# Altium PCB battery_module.PcbDoc
Units mm, origin at the board's own origin, x right, y up, seen from the top; angles counter-clockwise.
Board outline 90 x 40 mm, 2 copper layers (Top Layer, Bottom Layer), stack 2.021 mm thick; 12 components, 3 nets, 17 pads, 0 vias.
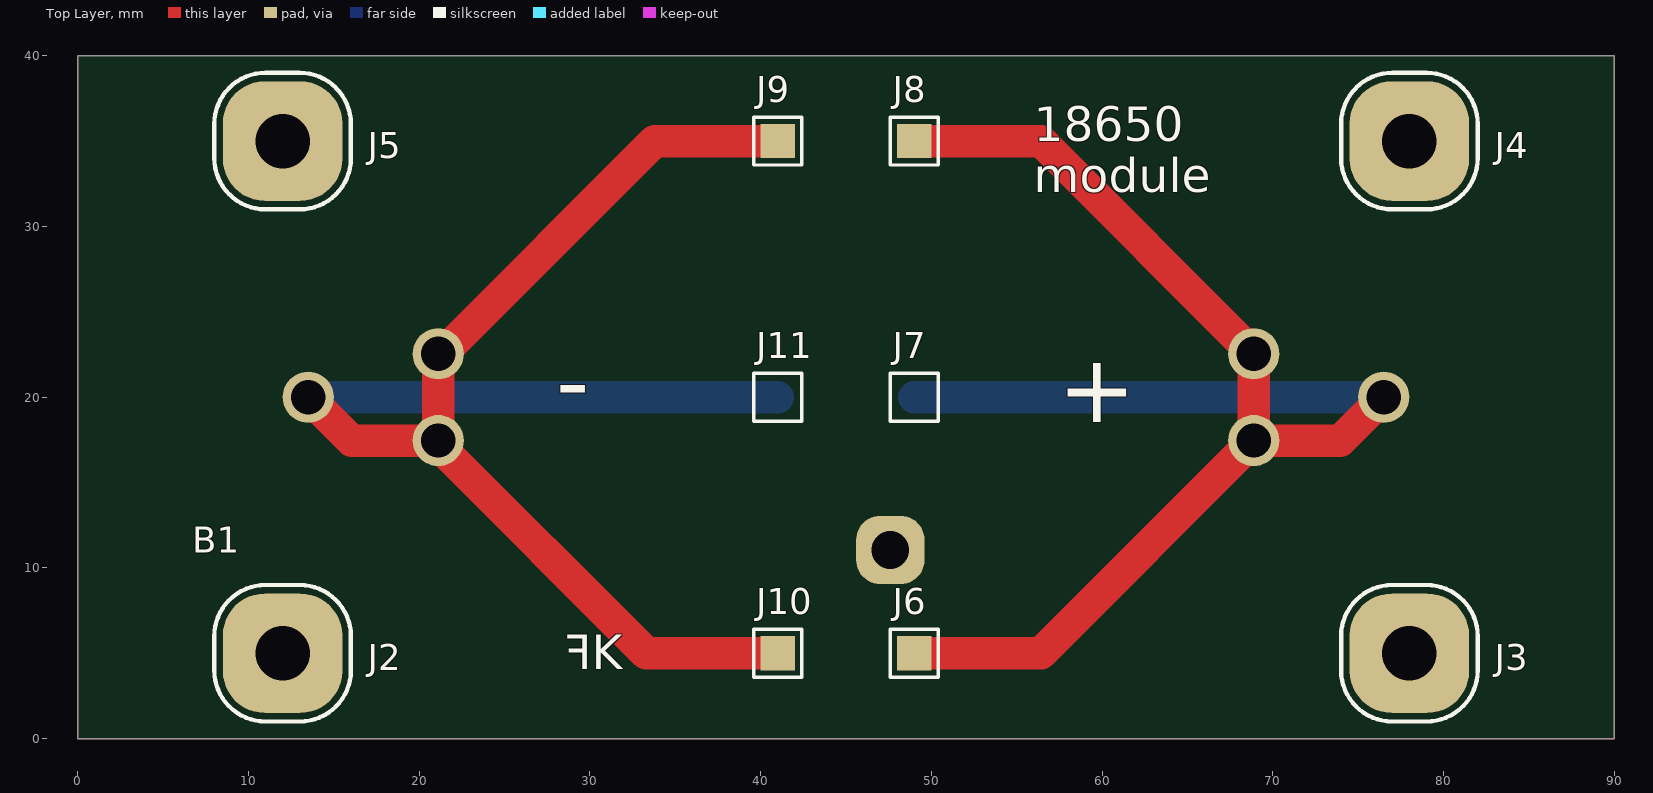
[diagram p0: Top Layer view]
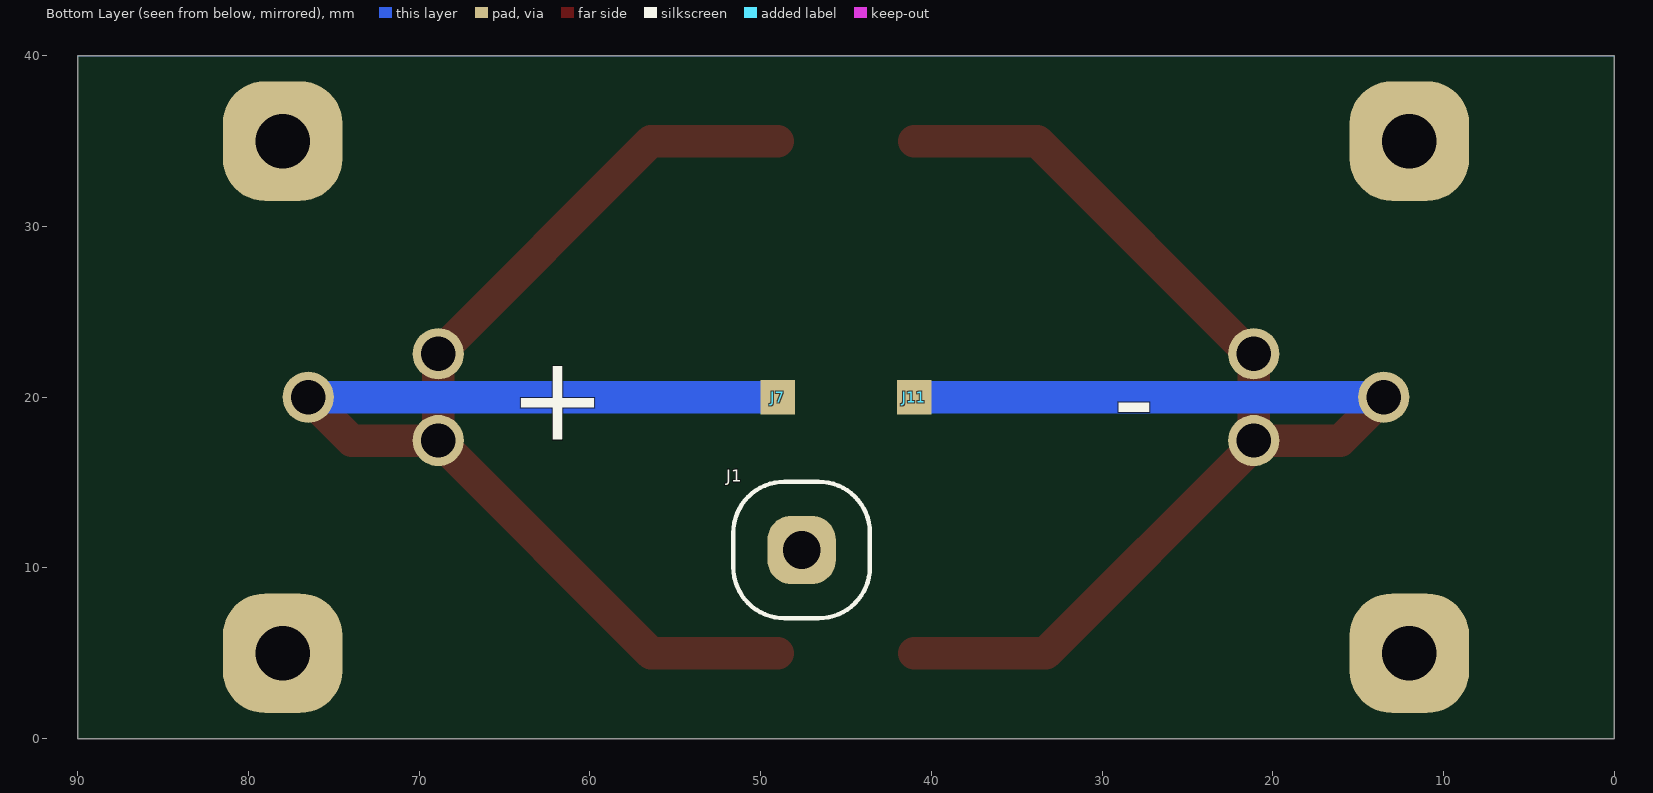
[diagram p1: Bottom Layer view, seen from below]

## Layer stack, top to bottom
Top Solder: solder mask 0.0102, Solder Resist, Dk 3.5
Top Layer: signal copper 0.0356
Dielectric 1: dielectric 1.95, FR-4, Dk 4.8
Bottom Layer: signal copper 0.0356
Bottom Solder: solder mask 0.0102, Solder Resist, Dk 3.5

## Board outline
0,0 90,0 90,40 0,40

## Design rules (kind name [scope] priority, off if disabled: settings)
Clearance [All] p1: gap=0.5 ignorepadtopadclearanceinfootprint=FALSE
PlaneConnect [All] p1: planeconnectstyle=Direct reliefexpansion=0.508 reliefentries=4 reliefconductorwidth=0.254 reliefairgap=0.254
PolygonConnect [All] p1: connectstyle=Direct reliefconductorwidth=0.254 reliefentries=4 polygonreliefangle="90 Angle" airgapwidth=0.254
RoutingVias [All] p1: holewidth=0.711 width=1.27 viastyle="Through Hole" minholewidth=0.711 minwidth=1.27 maxholewidth=0.711 maxwidth=1.27
SolderMaskExpansion [All] p1: expansion=0.102
Width [All] p1: maxlimit=2.54 minlimit=0.254 preferedwidth=1.27
29 further rules are at their usual default settings.

## Classes and differential pairs
component class battery_module: B1 J2 J3 J4 J5 J6 J7 J8 J9 J10 J11

## Components (designator, comment, footprint, x,y, rotation, side; value= is the part's Value field where it differs from the comment)
B1 "18650" 18650 45,20 r180 top
J1 "M3" HOLE_M3#1 47.6,11.05 r180 bottom
J2 "M3" HOLE_M3#2 12,5 r0 top
J3 "M3" HOLE_M3#2 78,5 r0 top
J4 "M3" HOLE_M3#2 78,35 r0 top
J5 "M3" HOLE_M3#2 12,35 r0 top
J6 "Pad" PAD_2X2MM#1 49,5 r0 top
J7 "Pad" PAD_2X2MM#2 49,20 r0 top
J8 "Pad" PAD_2X2MM#1 49,35 r0 top
J9 "Pad" PAD_2X2MM#1 41,35 r0 top
J10 "Pad" PAD_2X2MM#1 41,5 r0 top
J11 "Pad" PAD_2X2MM#2 41,20 r0 top

## Footprints (in the part's own frame and the unit in brackets; to place one, negate y for a bottom-side part, rotate by r counter-clockwise, add the part's x,y. Pads: shape width x height; smd on the part's side, far side on the other; paste and mask are expansions set on the pad)
18650 [mm]
  round 3 hole 2: 1(-31.5,0) 1(-23.88,-2.54) 1(-23.88,2.54) 2(23.88,-2.54) 2(23.88,2.54) 2(31.5,0)
  body extent -34.92,-9.44 34.92,9.44, height 18.16
HOLE_M3#1 [mm]
  rrect70% 4x4 hole 2.2 mask-4: 1(0,0)
  silkscreen extent -4,-4 4,4
HOLE_M3#2 [mm]
  rrect70% 7x7 hole 3.2 mask-4: 1(0,0)
  silkscreen extent -4,-4 4,4
PAD_2X2MM#1 [mm]
  rect 2x2 smd: 1(0,0)
  silkscreen extent -1.4,-1.4 1.4,1.4
PAD_2X2MM#2 [mm]
  rect 2x2 smd far side: 1(0,0)
  silkscreen extent -1.4,-1.4 1.4,1.4

## Part data
J1 J2 J3 J4 J5: library part "Screw M3 Hole", "Power Element with threaded hole M3"
B1: Supplier=TME, Symbol="KEYSTONE 54", URL=https://www.tme.eu/pl/details/keys54/baterie-pojemniki-i-uchwyty/keystone/54/

## Nets (pads, with @x,y where several pads share a name; then routed paths per layer and width w, separated by ;. In a path a pad name is that pad's centre, name@x,y a point inside that pad or via, vN(x,y) a via of type N, cw(c..) or ccw(c..) an arc to the next point about the centre after c; other vN are vias at no path point)
GND: J1.1 J2.1 J3.1 J4.1 J5.1
NetB1_1: B1.1 J6.1 J7.1 J8.1 | length 91.3
  Top Layer w1.9: J6.1 56.42,5 B1.1@68.88,17.46 ; J8.1 56.42,35 68.88,22.54 B1.1@68.88,17.46 ; B1.1@76.5,20 73.96,17.46 B1.1@68.88,17.46
  Bottom Layer w1.9: J7.1 B1.1@76.5,20
NetB1_2: B1.2 J9.1 J10.1 J11.1 | length 91.5
  Top Layer w1.9: B1.2@13.5,20 16.04,17.46 B1.2@21.12,17.46 ; J10.1 33.3,5 21.12,17.18 B1.2@21.12,17.46 ; J9.1 33.8,35 21.34,22.54 21.12,22.54 B1.2@21.12,17.46
  Bottom Layer w1.9: B1.2@13.5,20 J11.1

## Polygon pours and split planes (outlines as drawn)
GND on Top Layer "NONET_L01_P000" (solid, remove dead copper, shelved, pour order 0): 0,0 90,0 90,40 0,40
GND on Bottom Layer "NONET_L02_P006" (solid, remove dead copper, shelved, pour order 6): 0,0 90,0 90,40 0,40

## Silkscreen, mask and mechanical layers (free items; w line width, h text height)
Top Overlay:
  text "18650 / module" at 56,32 h2
  text "K" at 30.1,4.06 h2
  text "F" at 30.1,4.06 h2
Bottom Overlay:
  text "-" at 26.9,17.5 h5
  text "+" at 59,17.5 h5
Mechanical 2:
  the board outline again, w0.2

## Text inside footprints (layer, text, board x,y; h text height)
B1: Top Overlay "-" at 30,22 h4 r180; Top Overlay "+" at 62,22 h4 r180